# EAGLE board ESP32 TempBoard v32 (EAGLE 9.7.0)
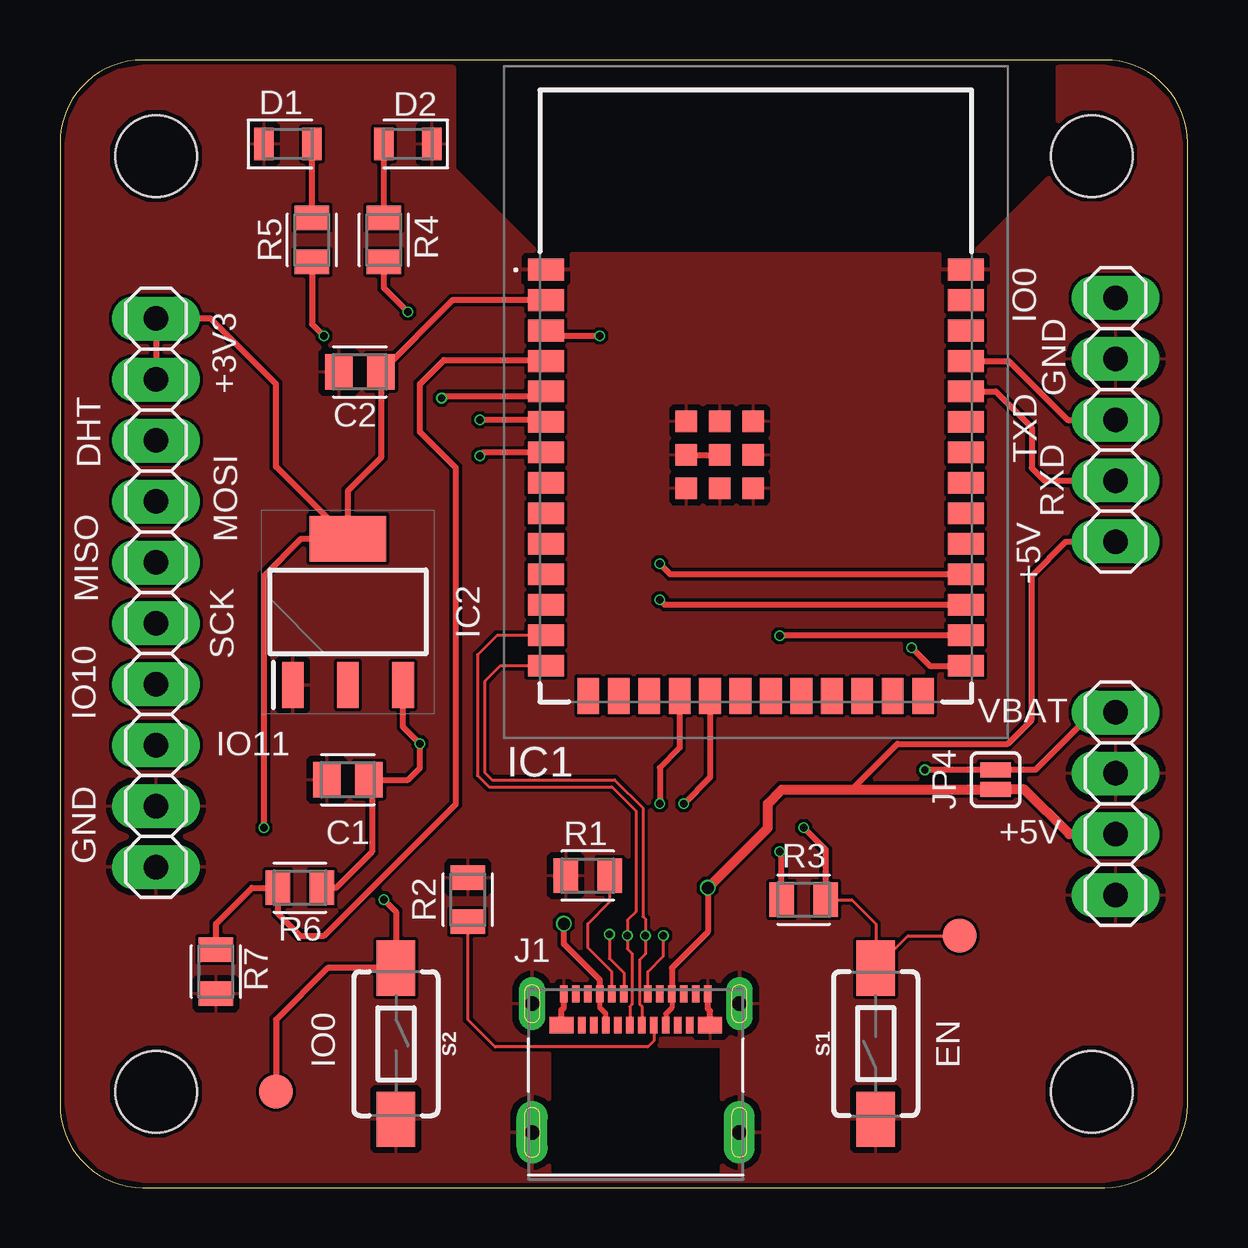
[diagram p0: board, top side]
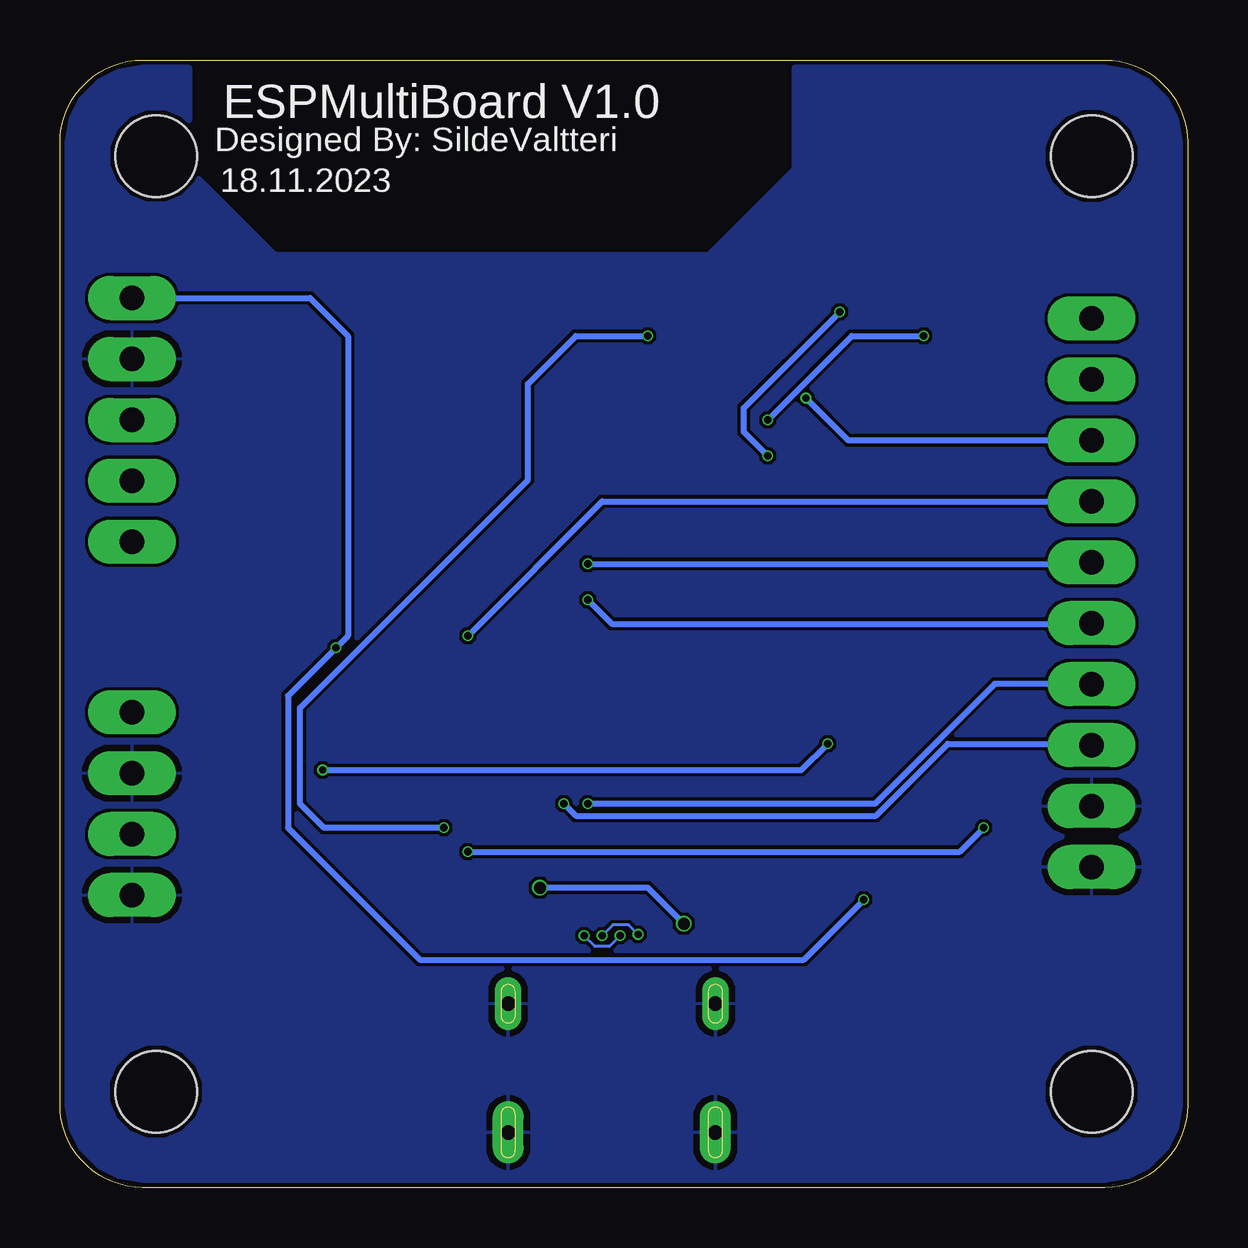
[diagram p1: board, bottom side, seen from below]

Size 47 x 47 mm. Coordinates in mm from the lower left corner, seen from the top.
Outline: 0,43.55 0,3.45 arc90 3.45,0 43.55,0 arc90 47,3.45 47,43.55 arc90 43.55,47 3.45,47 arc90 0,43.55
Copper layers (1*16): Top / Bottom
Stack-up Default Layer Stack: Top User Defined 0.035mm / Dielectric-1 User Defined 1.6mm / Bottom User Defined 0.035mm
Design rules: minimum copper width 5mil, minimum drill size 0.3mm, copper clearance wire_polygon to wire_polygon 5mil, copper clearance wire_polygon to pad_smd 5mil, copper clearance wire_polygon to via 5mil, copper clearance pad_smd to pad_smd 5mil, copper clearance pad_smd to via 5mil, copper clearance via to via 5mil, copper clearance smd to pad (same net) 5mil, copper clearance smd to via (same net) 5mil, copper clearance smd to smd (same net) 5mil, dimension clearance 0.2mm, restrict clearance 0mil, drill distance 6mil, keepout clearance 0mil
Holes 3.4 mm at 4,43 43,43 43,4 4,4
tRestrict: area 16.5,39 to 41.5,47.5
bRestrict: area 16.5,39 to 41.5,47.5

## Footprints (pad centres in the part's own frame; a part is rotated, then mirrored left to right if it is on the bottom)
CAPC2012X110 = smd 1.165 x 1.465: 1 -0.875,0; 2 0.875,0
LEDC2012X110N_B = smd 0.817 x 1.352: 1 -1,0 | smd 0.822 x 1.352: 2 0.998,0
LEDC2012X110N_R = smd 0.817 x 1.352: 1 -1,0 | smd 0.822 x 1.352: 2 0.998,0
ESP32S3WROOM1N16R2 = smd 1.5 x 0.9: 1 -8.75,5.26; 2 -8.75,3.99; 3 -8.75,2.72; 4 -8.75,1.45; 5 -8.75,0.18; 6 -8.75,-1.09; 7 -8.75,-2.36; 8 -8.75,-3.63; 9 -8.75,-4.9; 10 -8.75,-6.17; 11 -8.75,-7.44; 12 -8.75,-8.71; 13 -8.75,-9.98; 14 -8.75,-11.25; 27 8.75,-11.25; 28 8.75,-9.98; 29 8.75,-8.71; 30 8.75,-7.44; 31 8.75,-6.17; 32 8.75,-4.9; 33 8.75,-3.63; 34 8.75,-2.36; 35 8.75,-1.09; 36 8.75,0.18; 37 8.75,1.45; 38 8.75,2.72; 39 8.75,3.99; 40 8.75,5.26 | smd 0.9 x 1.5: 15 -6.985,-12.5; 16 -5.715,-12.5; 17 -4.445,-12.5; 18 -3.175,-12.5; 19 -1.905,-12.5; 20 -0.635,-12.5; 21 0.635,-12.5; 22 1.905,-12.5; 23 3.175,-12.5; 24 4.445,-12.5; 25 5.715,-12.5; 26 6.985,-12.5 | smd 0.9 x 0.9: 41 -1.5,-2.46; 42 -1.5,-1.06; 43 -2.9,-1.06; 44 -2.9,-2.46; 45 -2.9,-3.86; 46 -1.5,-3.86; 47 -0.1,-3.86; 48 -0.1,-2.46; 49 -0.1,-1.06
SOT230P700X180-4N = smd 1.9 x 0.9: 1 -3.05,2.3; 2 -3.05,0; 3 -3.05,-2.3 | smd 1.9 x 3.2: 4 3.05,0
MOLEX_105450-0101 = smd 0.3 x 0.7: A1 -3,3.77; A2 -2.5,3.77; A3 -2,3.77; A4 -1.5,3.77; A5 -1,3.77; A6 -0.5,3.77; A7 0.5,3.77; A8 1,3.77; A9 1.5,3.77; A10 2,3.77; A11 2.5,3.77; A12 3,3.77; B2 2.25,2.47; B3 1.75,2.47; B4 1.25,2.47; B5 0.75,2.47; B6 0.25,2.47; B7 -0.25,2.47; B8 -0.75,2.47; B9 -1.25,2.47; B10 -1.75,2.47; B11 -2.25,2.47 | smd 1 x 0.7: B1 3.1,2.47; B12 -3.1,2.47 | drill 0.6 pad 1.1 long: S1 -4.32,3.36; S2 4.32,3.36 | drill 0.6 pad 1.3 long: S3 -4.32,-2; S4 4.32,-2
1X10 = drill 1.016 long: 1 -11.43,0; 2 -8.89,0; 3 -6.35,0; 4 -3.81,0; 5 -1.27,0; 6 1.27,0; 7 3.81,0; 8 6.35,0; 9 8.89,0; 10 11.43,0
1X04 = drill 1.016 long: 1 -3.81,0; 2 -1.27,0; 3 1.27,0; 4 3.81,0
SMT-JUMPER_2_NC_PASTE_SILK = smd 0.635 x 1.27: 1 -0.406,0; 2 0.406,0
1X05 = drill 1.016 long: 1 -5.08,0; 2 -2.54,0; 3 0,0; 4 2.54,0; 5 5.08,0
RESC2012X65 = smd 1.031 x 1.42: 1 -0.919,0; 2 0.919,0
TACTILE_SWITCH_SMD_6.0X3.5MM = smd 2.3 x 1.6: 1 -3.15,0; 2 3.15,0
TP14R = smd 1.4 x 1.4: TP 0,0

## Placement (x,y rotation side)
C1  10uF  [CAPC2012X110]  12,17 180 top
C2  10uF  [CAPC2012X110]  12.5,34 180 top
D1  LED_BLUE  [LEDC2012X110N_B]  9.5,43.5 0 top
D2  LED_RED  [LEDC2012X110N_R]  14.5,43.5 180 top
IC1  ESP32-S3-WROOM-1-N16R2  [ESP32S3WROOM1N16R2]  29,33 0 top
IC2  AP2114H-3.3TRG1  [SOT230P700X180-4N]  12,24 90 top
J1  USB-C_105450-0101  [MOLEX_105450-0101]  24,4.3 0 top
JP1  PINHD-1X10  [1X10]  4,24.79 270 top
JP3  PINHD-1X4  [1X04]  44,16 270 top
JP4  JUMPER-SMT_2_NC_PASTE_SILK  [SMT-JUMPER_2_NC_PASTE_SILK]  39,17 90 top
JP5  PINHD-1X5  [1X05]  44,32 90 top
R1  5.2k  [RESC2012X65]  22,13 0 top
R2  5.2k  [RESC2012X65]  17,12 270 top
R3  5.2k  [RESC2012X65]  31,12 180 top
R4  52  [RESC2012X65]  13.5,39.5 270 top
R5  30  [RESC2012X65]  10.5,39.5 270 top
R6  10K  [RESC2012X65]  10,12.5 180 top
R7  20K  [RESC2012X65]  6.5,9 270 top
S1  TS-1101  [TACTILE_SWITCH_SMD_6.0X3.5MM]  34,6 90 top
S2  TS-1101  [TACTILE_SWITCH_SMD_6.0X3.5MM]  14,6 270 top
TP1  TPSTP14R  [TP14R]  37.5,10.5 0 top
TP2  TPSTP14R  [TP14R]  9,4 0 top

## Library data of the parts
C1 C2 = Capacitor; CATEGORY: Capacitor
D1 = Opto-Electronic; CATEGORY: Opto-Electronic; COLOR: Blue; SUB-CATEGORY: LED
D2 = Opto-Electronic; CATEGORY: Opto-Electronic; COLOR: Red; SUB-CATEGORY: LED
IC1 = SamacSys_Parts; DESCRIPTION: SMD MODULE, ESP32-S3R2 WITH 2 MB; HEIGHT: 3.25mm; MANUFACTURER_NAME: Espressif Systems; MANUFACTURER_PART_NUMBER: ESP32-S3-WROOM-1-N16R2; MOUSER_PART_NUMBER: 356-ESP32S3WRM1N16R2; MOUSER_PRICE-STOCK: https://www.mouser.co.uk/ProductDetail/Espressif-Systems/ESP32-S3-WROOM-1-N16R2?qs=Li%252BoUPsLEnvy1bxV65eH%2Fw%3D%3D
IC2 = SamacSys_Parts; DESCRIPTION: 1A 3.3V Low Noise LDO Regulator SOT223 DiodesZetex AP2114H-3.3TRG1, LDO Voltage Regulator, 1 (Min)A, 3.3 V +/-1.5%, 2.5 6 Vin, 3-Pin SOT-223; HEIGHT: 1.8mm; MANUFACTURER_NAME: Diodes Inc.; MANUFACTURER_PART_NUMBER: AP2114H-3.3TRG1; MOUSER_PART_NUMBER: 621-AP2114H-3.3TRG1; MOUSER_PRICE-STOCK: https://www.mouser.co.uk/ProductDetail/Diodes-Incorporated/AP2114H-3.3TRG1?qs=x6A8l6qLYDDSG%2FfwzcsOhw%3D%3D
J1 = Usb-Connectors; AVAILABILITY: In Stock; CHECK_PRICES: https://www.snapeda.com/parts/105450-0101/Molex/view-part/?ref=eda; DESCRIPTION: USB Shielded I/O Receptacle,Type C,Right Angle,Surface Mount,Gold over Nickel | Molex Incorporated 105450-0101; MF: Molex; MP: 105450-0101; PACKAGE: None; PRICE: None; PURCHASE-URL: https://www.snapeda.com/api/url_track_click_mouser/?unipart_id=547391&manufacturer=Molex&part_name=105450-0101&search_term=None; SNAPEDA_LINK: https://www.snapeda.com/parts/105450-0101/Molex/view-part/?ref=snap
JP1 = Connector; CATEGORY: Headers; DESCRIPTION: Header, Straight, 10 Position; MANUFACTURER: Generic; MPN: Generic; OPERATING_TEMPERATURE: Generic; PART_STATUS: Active; PITCH: 0.100" (2.54mm); ROHS_COMPLIANCE: Generic; SERIES: Generic; SUB-CATEGORY: Headers, Male Pins; TYPE: Board to Board or Cable, Unshrouded, Through Hole, Straight
JP3 = Connector; CATEGORY: Headers; DESCRIPTION: Header, Straight, 4 Position; MANUFACTURER: Generic; MPN: Generic; OPERATING_TEMPERATURE: Generic; PART_STATUS: Active; PITCH: 0.100" (2.54mm); ROHS_COMPLIANCE: Generic; SERIES: Generic; SUB-CATEGORY: Headers, Male Pins; TYPE: Board to Board or Cable, Unshrouded, Through Hole, Straight
JP4 = SparkFun-Jumpers
JP5 = Connector; CATEGORY: Headers; DESCRIPTION: Header, Straight, 5 Position; MANUFACTURER: Generic; MPN: Generic; OPERATING_TEMPERATURE: Generic; PART_STATUS: Active; PITCH: 0.100" (2.54mm); ROHS_COMPLIANCE: Generic; SERIES: Generic; SUB-CATEGORY: Headers, Male Pins; TYPE: Board to Board or Cable, Unshrouded, Through Hole, Straight
R1-R7 = Resistor; CATEGORY: Resistor; SUB-CATEGORY: Fixed
S1 S2 = SparkFun-Switches; PROD_ID: SWCH-14278; SF_SKU: COM-08229
TP1 TP2 = testpad

## Nets
+3.3V: C2.1 IC1.2 IC2.4 JP1.1 JP1.2 R3.2
+5V: J1.A4 J1.A9 J1.B4 J1.B9 JP3.3 JP4.1 JP5.1
+VBAT: C1.1 IC2.3 JP3.1 JP4.2 R6.1
BATMON: IC1.4 R6.2 R7.1
BLUE_LED+: IC1.6 R5.2
D+: IC1.14 J1.A6 J1.B6
D-: IC1.13 J1.A7 J1.B7
DHT_D: IC1.5 JP1.3
GND: C1.2 C2.2 D1.1 D2.1 IC1.1 IC1.40 IC1.41 IC1.42 IC1.43 IC1.44 IC1.45 IC1.46 IC1.47 IC1.48 IC1.49 IC2.1 J1.A1 J1.A12 J1.B1 J1.B12 J1.S1 J1.S2 J1.S3 J1.S4 JP1.9 JP1.10 JP3.2 JP3.4 JP5.4 R1.1 R2.1 R7.2 S1.1 S2.2
GPIO0: IC1.27 JP5.5 S2.1 TP2.TP
IO10: IC1.18 JP1.7
IO11: IC1.19 JP1.8
MISO: IC1.30 JP1.5
MOSI: IC1.28 JP1.4
N$1: J1.A5 R1.2
N$2: J1.B5 R2.2
N$3: IC1.3 R3.1 S1.2 TP1.TP
N$4: D2.2 R4.1
N$5: D1.2 R5.1
RED_LED+: IC1.7 R4.2
RXD: IC1.36 JP5.2
SCK: IC1.29 JP1.6
TXD: IC1.37 JP5.3

## Tracks (layer width: path | path; a pad name or v marks a point on that pad's centre or on a via)
+3.3V  (via drill 0.3)
  Top 0.254: IC2.4 12,29.05 13.4,30.45 13.4,33.97 C2.1 16.36,36.99 IC1.2 | IC2.4 9,30.05 9,33.5 6.28,36.22 JP1.1 JP1.2 | R3.2 30.08,13.92 v30,14 | v8.5,15 8.5,25.5 10.05,27.05 IC2.4
  Bottom 0.254: v30,14 9.5,14 v8.5,15
+5V  (via drill 0.5)
  Top 0.2: J1.B4 25.25,7.25 25.5,7.5 J1.A9 | J1.B9 22.75,7.25 22.5,7.5 J1.A4
  Top 0.254: J1.A4 22.5,8.65 21,10.15 v21,11 | v27,12.5 27,10.65 25.5,9.15 J1.A9 | 33,16.59 34.91,18.5 39.5,18.5 40.5,19.5 40.5,25.5 41.92,26.92 JP5.1
  Top 0.406: v27,12.5 29.5,15 29.5,16 30.09,16.59 33,16.59 JP4.1 40.21,16.59 42.07,14.73 JP3.3
  Bottom 0.254: v21,11 22.5,12.5 v27,12.5
+VBAT  (via drill 0.3)
  Top 0.254: v36.05,17.4 v36.06,17.41 JP4.2 40.66,17.41 43.06,19.81 JP3.1 | C1.1 13,17 | 13,17 14.5,17 15,17.5 v15,18.5 14.3,19.2 IC2.3 | R6.1 11.5,12.5 13,14 13,17
  Bottom 0.254: v36.05,17.4 16.1,17.4 v15,18.5
BATMON
  Top 0.254: R7.1 6.5,11 8,12.5 R6.2 9.08,11.42 10,10.5 11,10.5 16.5,16 16.5,30 15,31.5 15,33.5 16,34.5 20.2,34.5 IC1.4
BLUE_LED+  (via drill 0.3)
  Top 0.254: IC1.6 20.16,32 v17.5,32 | R5.2 10.5,36 v11,35.5
  Bottom 0.254: v17.5,32 14,35.5 v11,35.5
D+  (via drill 0.3)
  Top 0.127: J1.B6 24.25,7.55 24.16,7.64 24.16,9.5 24.4,9.74 v24.4,10.5 24.4,11.2 24.3,11.3 24.3,15.82 23.12,17 18,17 17.7,17.3 17.7,21.1 18.35,21.75 IC1.14 | v22.9,10.55 22.9,9.55 23.5,8.95 J1.A6
  Bottom 0.127: v24.4,10.5 23.95,10.95 23.3,10.95 v22.9,10.55
D-  (via drill 0.3)
  Top 0.127: J1.B7 23.75,7.55 23.84,7.64 23.84,9.76 23.65,9.95 v23.65,10.5 23.65,11.15 24,11.5 24,15.7 23,16.7 17.88,16.7 17.4,17.18 17.4,22.2 18.22,23.02 IC1.13 | v25.15,10.5 25.15,9.65 24.5,9 J1.A7
  Bottom 0.127: v23.65,10.5 24.1,10.05 24.7,10.05 v25.15,10.5
DHT_D  (via drill 0.3)
  Top 0.254: IC1.5 20.07,33 16,33 v15.91,32.91
  Bottom 0.254: JP1.3 14.14,31.14 v15.91,32.91
GND
  Top 0.254: J1.B12 20.9,7.4 21,7.5 J1.A1 | J1.B1 27.1,7.35 27,7.45 J1.A12 | IC1.44 IC1.41
  pour Top: 6.5,50.5 1,50.5 -3.5,46 -3.5,-1 -2.5,-2 49,-2 49.5,-1.5 49.5,48.5 48,50 8.5,50 8.5,56.5 7.5,57.5 7.5,51.5
  pour Bottom: 10.5,50.5 8.5,48.5 2,48.5 1.5,48 0,48 -1.5,46.5 -1.5,0.5 3.5,-4.5 44.5,-4.5 52.5,3.5 52.5,55 48.5,59 40.2,50.7 10,50.7 9.8,50.5
GPIO0  (via drill 0.3)
  Top 0.254: v35.5,22.5 36.25,21.75 IC1.27 | v13.5,12 14,11.5 S2.1 11.15,9.15 9,7 TP2.TP
  Bottom 0.254: v13.5,12 16,9.5 32,9.5 37.5,15 37.5,20.5 v35.5,22.5 35,23 35,35.5 36.58,37.08 JP5.5
IO10  (via drill 0.3)
  Top 0.254: IC1.18 25.82,18.33 25,17.5 v25,16
  Bottom 0.254: JP1.7 4.02,21 8.04,21 13.04,16 v25,16
IO11  (via drill 0.3)
  Top 0.254: IC1.19 27.09,17.09 v26,16
  Bottom 0.254: v26,16 25.5,15.5 13,15.5 10,18.5 4.06,18.5 JP1.8
MISO  (via drill 0.3)
  Top 0.254: IC1.30 25.44,25.56 v25,26
  Bottom 0.254: v25,26 4.06,26 JP1.5
MOSI  (via drill 0.3)
  Top 0.254: IC1.28 30.02,23.02 v30,23
  Bottom 0.254: v30,23 24.4,28.6 JP1.4
N$1
  Top 0.127: R1.2 22.92,11.92 22,11 22,10 23,9 J1.A5
N$2
  Top 0.127: J1.B5 24.75,6.11 24.5,5.86 18.14,5.86 17,7 R2.2
N$3  (via drill 0.3)
  Top 0.127: R3.1 33,12 34,11 S1.2 35.35,10.5 TP1.TP
  Top 0.254: R3.1 31.92,14.08 v31,15 | v22.5,35.5 20.47,35.5 IC1.3
  Bottom 0.254: v31,15 36,15 37,16 37,20 27.5,29.5 27.5,33.5 25.5,35.5 v22.5,35.5
N$4
  Top 0.254: R4.1 D2.2
N$5
  Top 0.254: R5.1 D1.2
RED_LED+  (via drill 0.3)
  Top 0.254: IC1.7 17.64,30.64 v17.5,30.5 | v14.5,36.5 13.5,37.5 R4.2
  Bottom 0.254: v17.5,30.5 18.5,31.5 18.5,32.5 v14.5,36.5
RXD
  Top 0.254: IC1.36 39,33.18 40.5,31.68 40.5,30 41.04,29.46 JP5.2
SCK  (via drill 0.3)
  Top 0.254: IC1.29 25.21,24.29 v25,24.5
  Bottom 0.254: v25,24.5 24,23.5 4.02,23.5 JP1.6
TXD
  Top 0.254: IC1.37 39.55,34.45 42,32 JP5.3

## Text on the board
tPlace: IO0 | +3V3 | GND | DHT | TXD | RXD | MOSI | +5V | MISO | SCK | IO10 | IO11 | VBAT | GND | +5V | EN | IO0
bPlace: ESPMultiBoard V1.0 | Designed By: SildeValtteri | 18.11.2023